# EAGLE board blinky_ali (EAGLE 8.0.0)
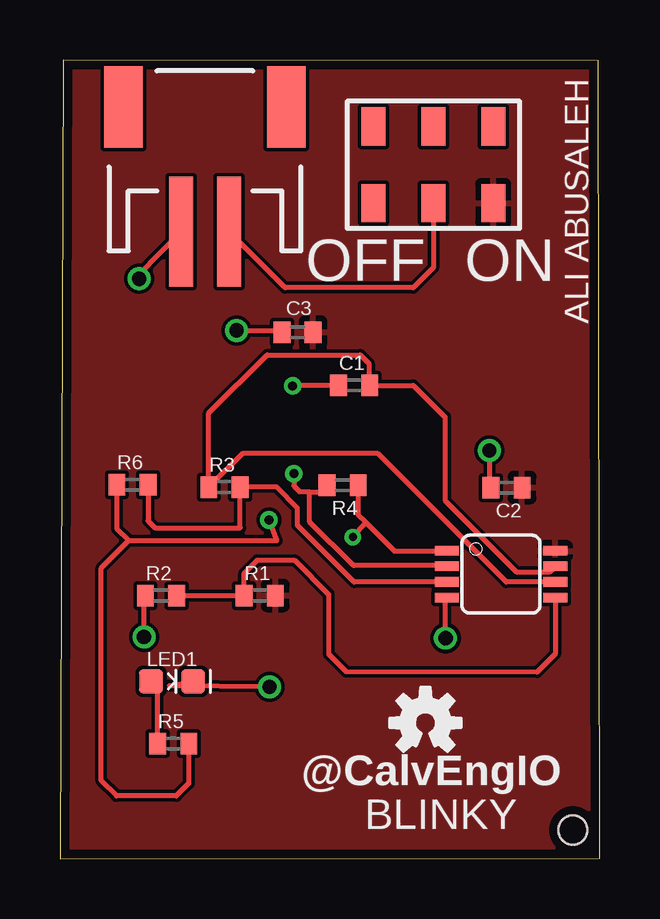
[diagram p0: board, top side]
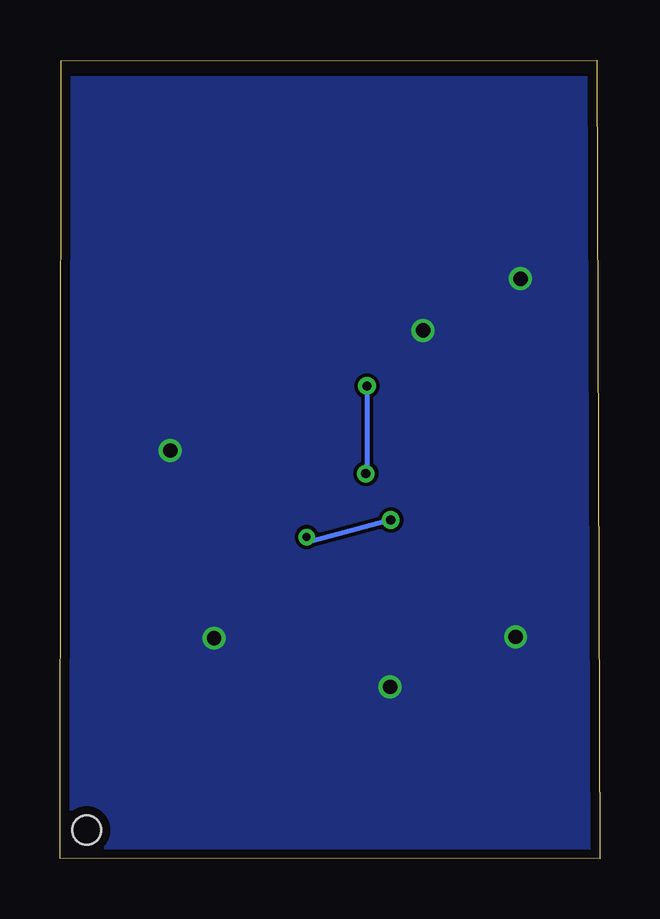
[diagram p1: board, bottom side, seen from below]

Size 22.5 x 33.3 mm. Coordinates in mm from the lower left corner, seen from the top.
Outline: 0,0 22.5,0.03 22.45,33.27 0.13,33.3 0,0
Copper layers (1*16): Top 0.0356mm / dielectric 1.5011mm / Bottom 0.0356mm
Design rules "LaenPCBOrder": minimum track width 6mil, minimum drill 13mil, track to track 6mil, track to pad 6mil, pad to pad 6mil, via to via 6mil, smd to smd 6mil, copper to edge 15mil, drill to drill 6mil, minimum pad ring 7mil, minimum via ring 7mil, stop-mask expansion 3mil, vias tented up to drill 0mil, thermal gap 10mil
Holes 1.2 mm at 21.39,1.19

## Footprints (pad centres in the part's own frame; a part is rotated, then mirrored left to right if it is on the bottom)
C0402 = smd 0.7 x 0.9: 1 -0.65,0; 2 0.65,0
MSOP08 = smd 0.4 x 1: 1 -0.976,-2.263; 2 -0.326,-2.263; 3 0.324,-2.263; 4 0.974,-2.263; 5 0.974,2.262; 6 0.324,2.262; 7 -0.326,2.262; 8 -0.976,2.262
JST-2-SMD = smd 1 x 4.6: 1 -1,-3.7; 2 1,-3.7 | smd 1.6 x 3.4: NC1 -3.4,1.5; NC2 3.4,1.5
LED-0603 = smd 1 x 1: A -0.877,0; C 0.877,0
R0402 = smd 0.7 x 0.9: 1 -0.65,0; 2 0.65,0
SWITCH.00 = smd 1 x 1.6: 1 -2.5,1.6; 2 0,1.6; 3 2.5,1.6; 5 -2.5,-1.6; 6 0,-1.6; 7 2.5,-1.6

## Placement (x,y rotation side)
C1  100nF  [C0402]  12.27,19.74 0 top
C2  100nF  [C0402]  18.62,15.47 180 top
C3  100nF  [C0402]  9.91,21.95 0 top
IC1  OP-DUALRM  [MSOP08]  18.39,11.86 270 top
J1  [JST-2-SMD]  6.05,29.84 0 top
LED1  [LED-0603]  4.67,7.39 0 top
LOGO1  OSHW-LOGOS  [OSHW-LOGO-S]  15.24,5.66 0 top
R1  10K  [R0402]  8.33,10.97 0 top
R2  10K  [R0402]  4.22,10.97 0 top
R3  10K  [R0402]  6.86,15.49 0 top
R4  3.3M  [R0402]  11.79,15.57 180 top
R5  300  [R0402]  4.72,4.8 0 top
R6  10K  [R0402]  3.02,15.6 0 top
U$4  CALVENGIO_HANDLEHANDLE.05  [CALVENGIO_HANDLE.05]  15.14,3.05 0 top
U$5  SWITCH.JS202011JCQN  [SWITCH.00]  15.57,28.93 180 top

## Library data of the parts
C1-C3 R1-R6 = CalvEngIO-Passives
IC1 = CalvEngIO-AnalogIC; MF: ALTERA CORPORATION; MPN: AD8607ARMZ-REEL; OC_FARNELL: 1464990; OC_NEWARK: 59K6925
J1 = CalvEngIO-Connectors; PROD_ID: CONN-11443; SF_ID: PRT-08612
LED1 = CalvEngIO-LED
LOGO1 U$4 = CalvEngIO-Logos
U$5 = CalvEngIO-Switches

## Nets
GND: C2.2 C3.1 IC1.4 J1.1 LED1.C R2.1
N$1: C1.1 IC1.2 R4.2
N$2: IC1.5 R1.1 R2.2
N$3: C1.2 IC1.6 IC1.7 R3.1
N$4: IC1.1 R4.1 R5.2 R6.1
N$5: IC1.3 R3.2 R6.2
N$6: J1.2 U$5.2
N$7: LED1.A R5.1
VLIPO: C2.1 C3.2 IC1.8 R1.2 U$5.1

## Tracks (layer width: path | path; a pad name or v marks a point on that pad's centre or on a via)
GND  (via drill 0.6)
  Top 0.203: C3.1 9.26,22.05 9.23,22.02 v7.37,22.02 | v3.3,24.18 3.3,24.35 J1.1 | v17.91,17.02 17.91,15.53 C2.2 | v8.74,7.16 4.56,7.21 LED1.C | v3.51,9.25 3.51,10.91 R2.1 | v16.08,9.19 16.08,10.84 IC1.4
  pour Bottom: -5.87,32.51 30.51,32.51 30.51,-4.17 -5.94,-4.17 -5.94,32.51
N$1  (via drill 0.38)
  Top 0.203: IC1.2 16.1,12.22 12.24,12.22 10.41,14.05 10.41,15.27 10.39,15.29 | C1.1 9.73,19.74 v9.7,19.71 | v9.75,16.05 9.75,15.54 10.01,15.29 10.39,15.29 | 10.39,15.29 10.86,15.29 R4.2
  Bottom 0.203: v9.7,19.71 9.7,16.1 v9.75,16.05
N$2
  Top 0.203: R2.2 R1.1 7.68,11.9 8.23,12.45 9.78,12.45 11.2,11.02 11.2,8.53 11.94,7.8 19.89,7.77 20.65,8.54 IC1.5
N$3
  Top 0.203: IC1.7 20.43,11.96 19.02,11.96 16.05,14.94 16.05,18.41 14.73,19.74 C1.2 12.88,19.78 12.88,20.65 12.52,21.01 8.64,21.01 6.21,18.58 R3.1 7.61,16.89 13.26,16.89 18.61,11.54 IC1.6
N$4  (via drill 0.33 pad 0.41, 0.38)
  Top 0.203: R4.1 12.44,14.34 12.76,14.01 | 12.76,14.01 13.94,12.83 16.12,12.83 IC1.1 | R6.1 2.37,13.76 2.87,13.26 | 2.87,13.26 9.04,13.26 v8.71,14.12 | v12.22,13.41 12.76,14.01 | R5.2 5.37,3.14 4.85,2.62 2.36,2.62 1.73,3.25 1.73,12.12 2.87,13.26
  Bottom 0.203: v8.71,14.12 12.04,13.23 v12.22,13.41
N$5
  Top 0.203: IC1.3 12.27,11.53 9.91,13.89 9.91,14.63 9.04,15.49 R3.2 7.52,15.48 7.52,13.79 3.96,13.79 3.67,14.08 R6.2
N$6
  Top 0.203: U$5.2 15.57,24.64 14.73,23.8 9.39,23.8 J1.2
N$7
  Top 0.203: R5.1 4.07,7.11 LED1.A
VLIPO
  pour Top: -6.63,32.84 30.56,32.84 30.56,-4.29 -6.71,-4.29 -6.71,32.84

## Text on the board
tNames: OFF | ON | ALI ABUSALEH | BLINKY